# Altium PCB lab_1_zhernakov_usb_rs232.PcbDoc
Units mm, origin at the board's own origin, x right, y up, seen from the top; angles counter-clockwise.
Board outline 60.5 x 36.5 mm, 4 copper layers (Top Layer, Signal Layer 1, Signal Layer 2, Bottom Layer), stack 1.522 mm thick; 33 components, 37 nets, 147 pads, 107 vias.
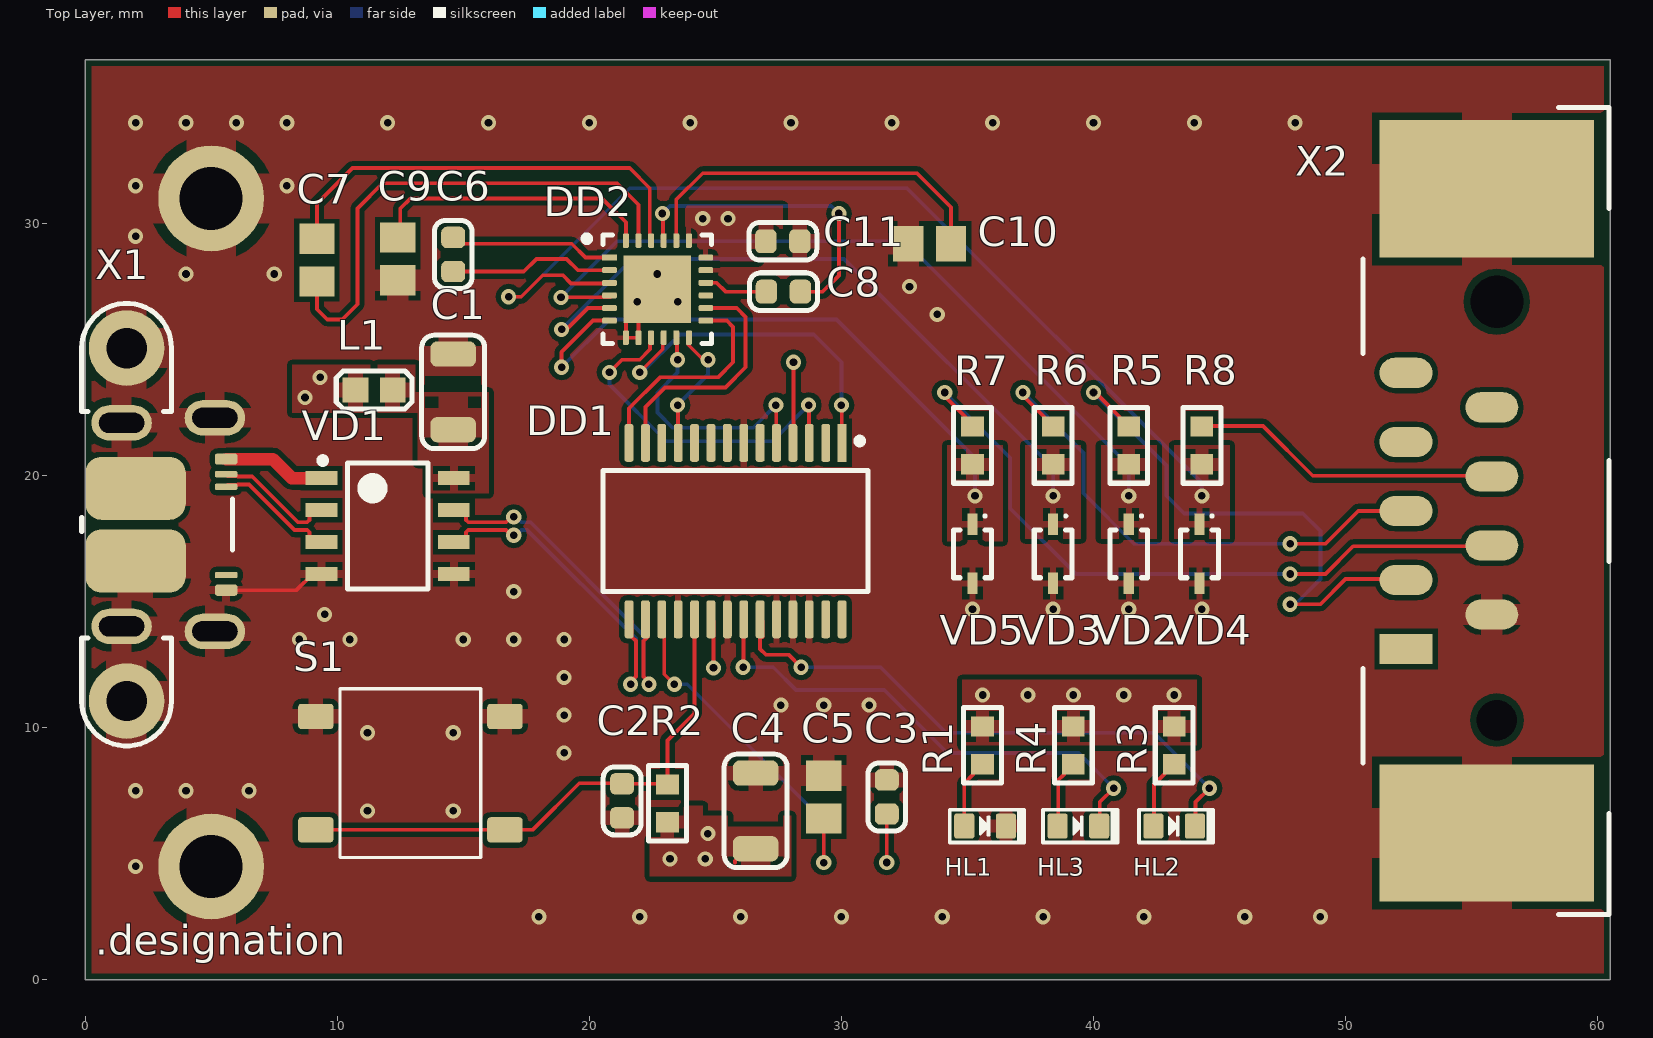
[diagram p0: Top Layer view]
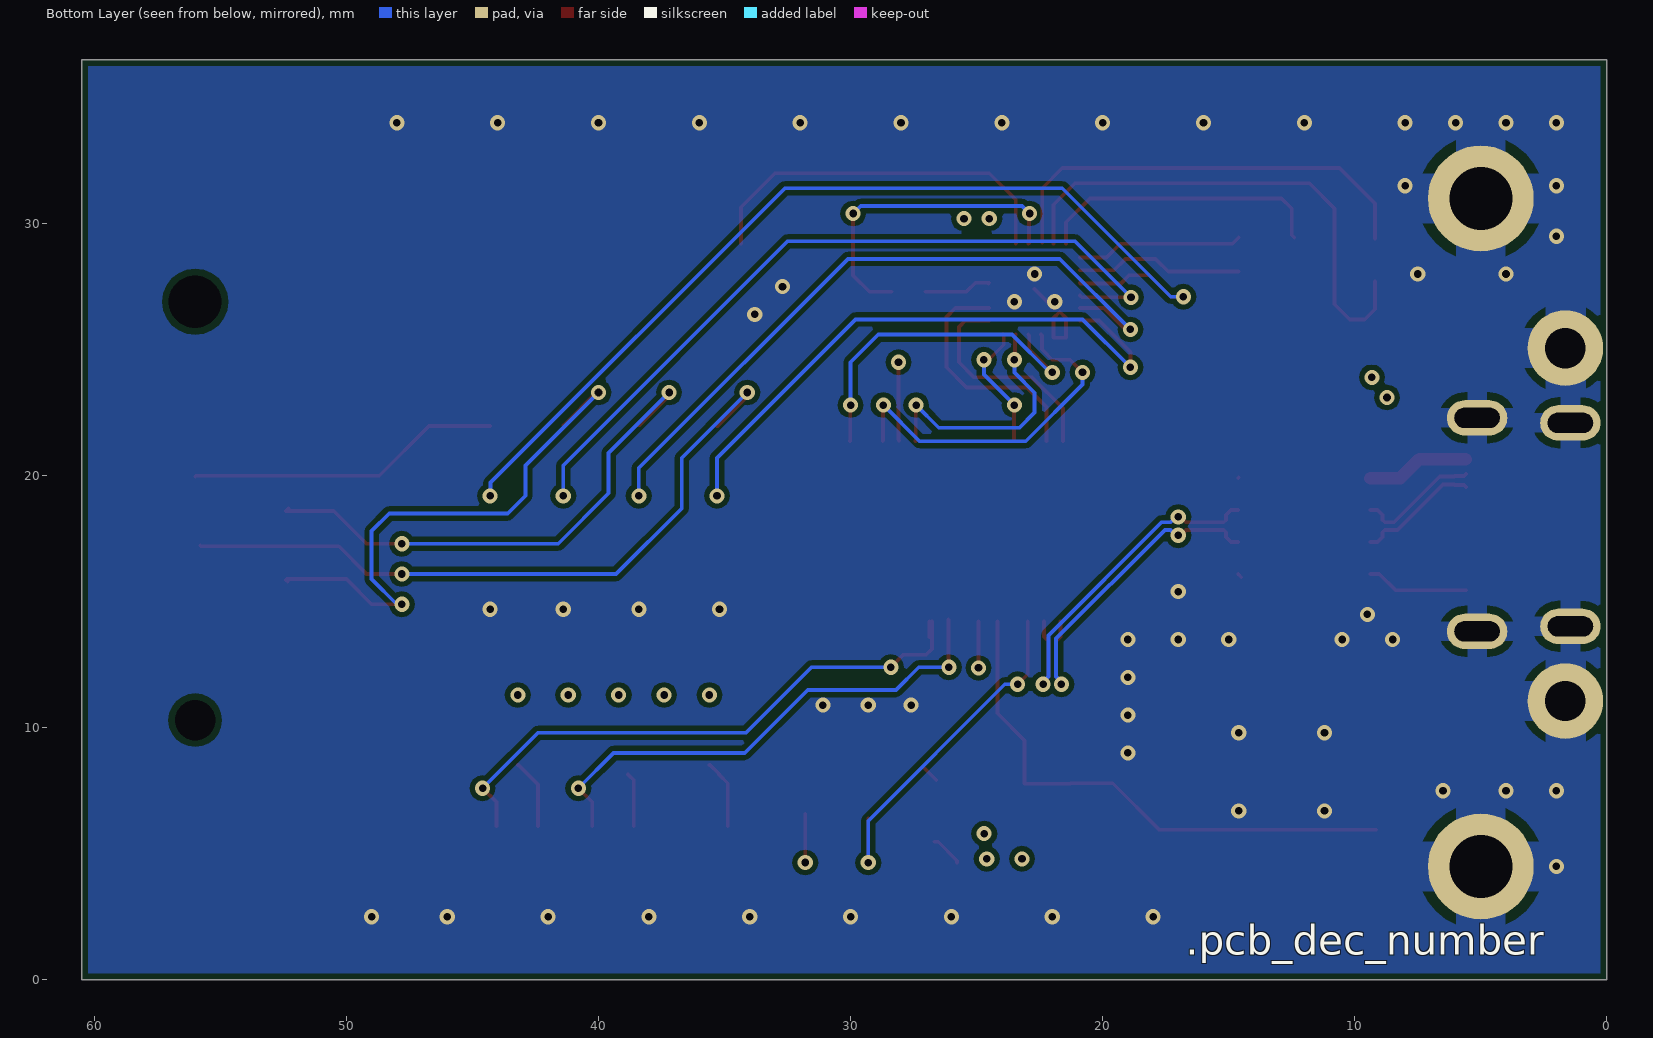
[diagram p1: Bottom Layer view, seen from below]
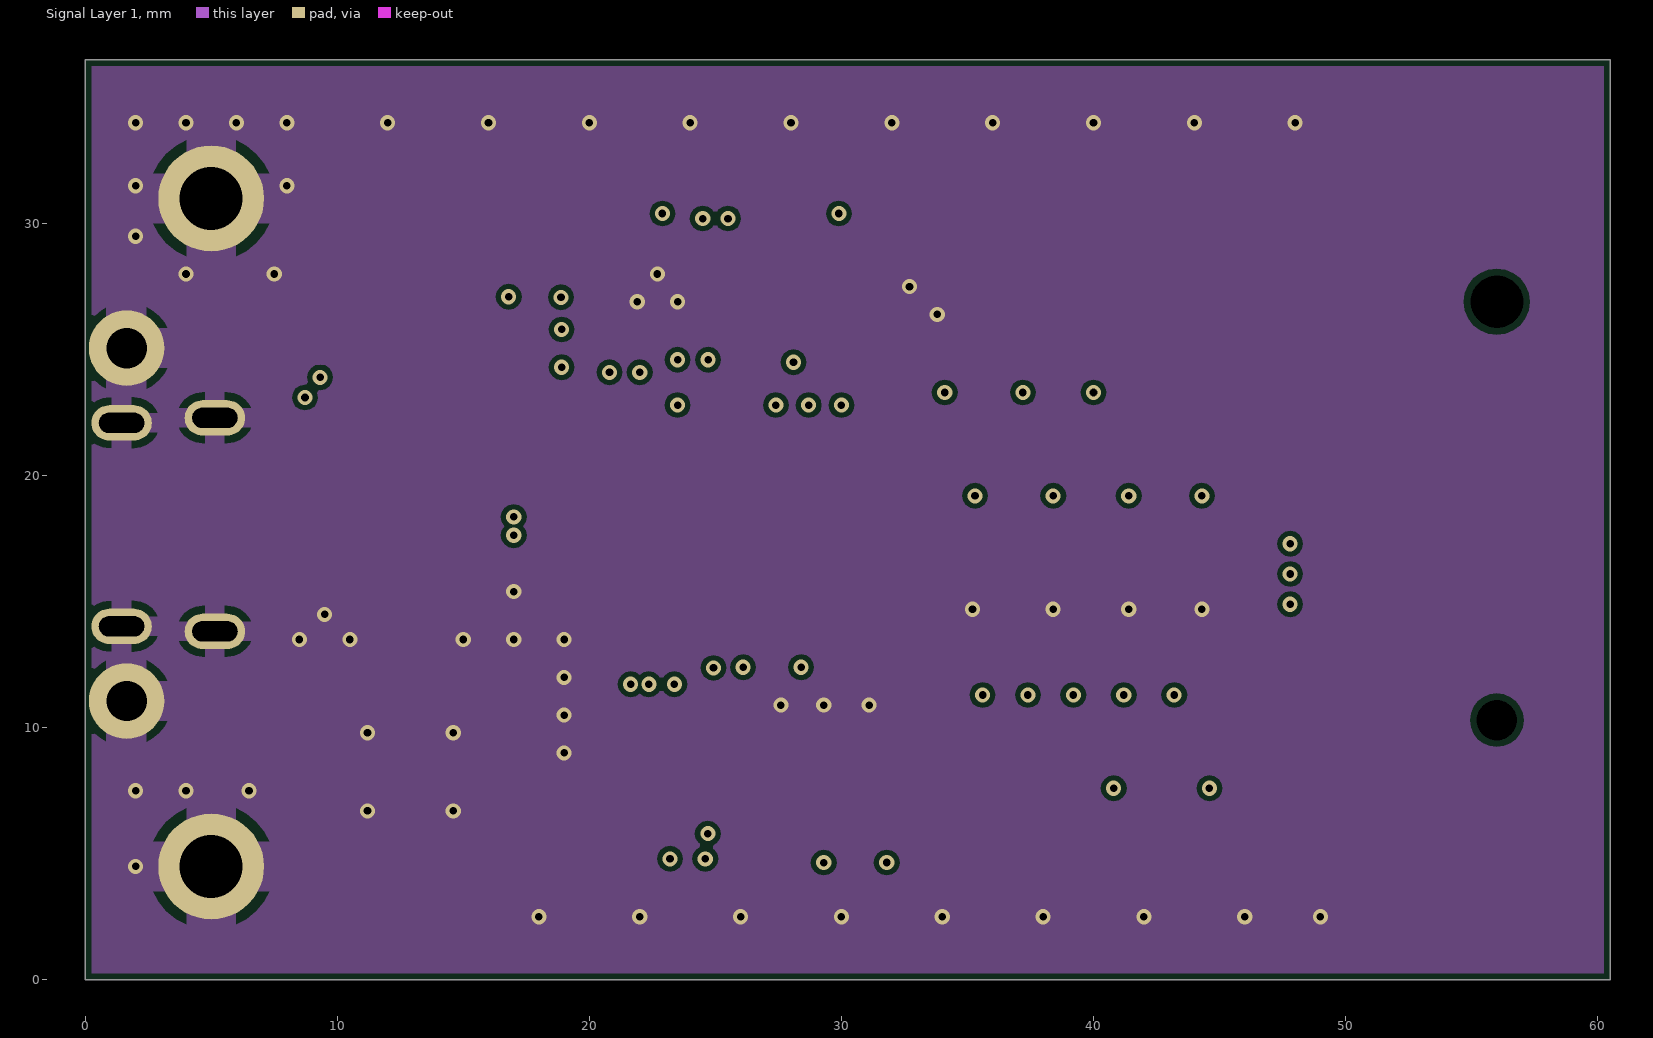
[diagram p2: Signal Layer 1]
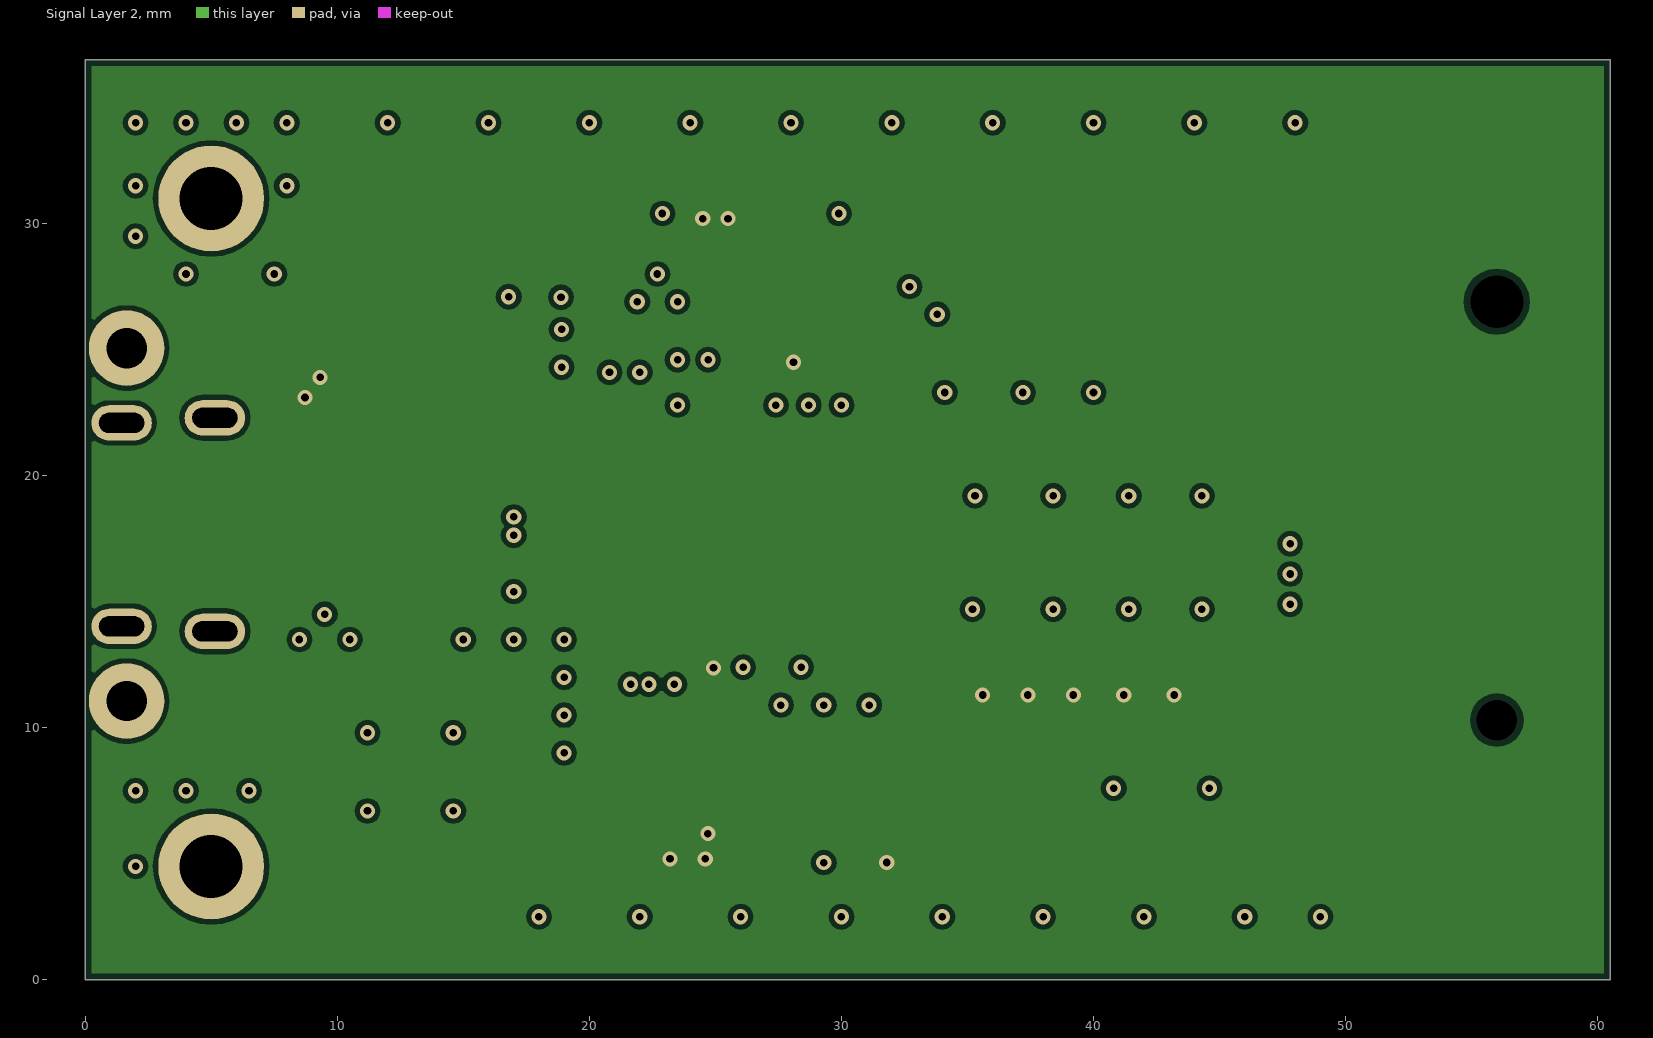
[diagram p3: Signal Layer 2]
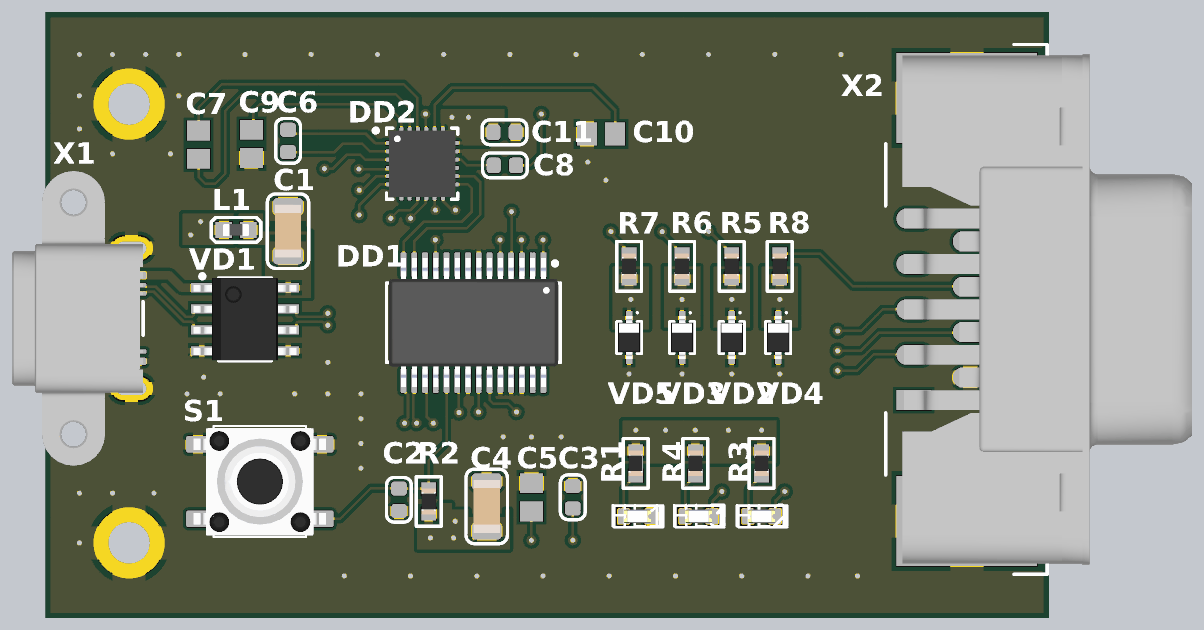
[diagram p4: 3D render of the assembled board from above, using the file's embedded part models]

## Layer stack, top to bottom
Top Solder: solder mask 0.0102, Solder Resist, Dk 3.5
Top Layer: signal copper 0.018
Prepreg 1: prepreg 0.125, FR4 HiTg170, Dk 5.07
Signal Layer 1: signal copper 0.018
Core 1: core 1.2, FR4, Dk 4.6
Signal Layer 2: signal copper 0.018
Prepreg 2: prepreg 0.125, FR4 HiTg170, Dk 5.07
Bottom Layer: signal copper 0.018
Bottom Solder: solder mask 0.0102, Solder Resist, Dk 3.5

## Board outline
0,0 60.5,0 60.5,36.5 0,36.5

## Design rules (kind name [scope] priority, off if disabled: settings)
AcuteAngle min_acute_angle [OnCopper] p1: minimum=3.50000000000000E+0001 checktracksonly=FALSE // Минимальный угол между примитивами топологии
BoardOutlineClearance board_outline_clearance_std [NOT (OnLayer('Bottom Overlay') OR OnLayer('Top Overlay'))] p1: gap=0.25 ignorepadtopadclearanceinfootprint=FALSE except(0: Arc-SplitContinuation Track-SplitContinuation SMDPad-SplitContinuation THPad-SplitContinuation Via-SplitContinuation Fill-SplitContinuation Poly-SplitContinuation Region-SplitContinuation Text-SplitContinuation) // Отступ элементов топологии от края фрезеруемой печатной платы
Clearance clearance_outer_18um_std [OnTopLayer OR OnBottomLayer] p1: gap=0.125 ignorepadtopadclearanceinfootprint=TRUE except(0.2: Arc-Fill Arc-Poly Track-Fill Track-Poly SMDPad-SMDPad SMDPad-Fill SMDPad-Poly THPad-Fill THPad-Poly Via-Fill Via-Poly Fill-Fill Fill-Poly Poly-Poly Poly-Region Poly-Text; 0.25: Arc-Hole Track-Hole SMDPad-Hole THPad-Hole Via-Hole Fill-Hole Poly-Hole Region-Hole Text-Hole) // Зазоры на внешних слоях
Clearance clearance_inner_18um_std [NOT (OnTopLayer Or OnBottomLayer)] p2: gap=0.125 ignorepadtopadclearanceinfootprint=FALSE except(0.2: Arc-Fill Arc-Poly Track-Fill Track-Poly SMDPad-SMDPad SMDPad-Fill SMDPad-Poly THPad-Fill THPad-Poly Via-Fill Via-Poly Fill-Fill Fill-Poly Poly-Poly Poly-Region Poly-Text; 0.25: Arc-Hole Track-Hole SMDPad-Hole THPad-Hole Via-Hole Fill-Hole Poly-Hole Region-Hole Text-Hole) // Зазоры на внутренних слоях
ComponentClearance [All] p1: gap=0 collisioncheckmode=3 verticalgap=0 showdistances=FALSE
DiffPairsRouting "Schematic Differential Pairs Routing_3" [InNet('USB_D_P')] p1: maxlimit=0.254 minlimit=0.15 mostfreqgap=0.254 toplayer_maxgap=0.15 toplayer_prefgap=0.15 toplayer_minwidth=0.155 toplayer_maxwidth=0.155 toplayer_prefwidth=0.155 bottomlayer_maxgap=0.15 bottomlayer_prefgap=0.15 bottomlayer_minwidth=0.155 bottomlayer_maxwidth=0.155 bottomlayer_prefwidth=0.155 impedanceprofiledriven=TRUE impedanceprofileid={1B1F1868-2FFB-4D51-908A-913D90CA9AFC} impedanceprofilevalue=95.000000 maxuncoupledlength=12.7
DiffPairsRouting "Schematic Differential Pairs Routing_2" [InNet('CN_D_P')] p2: maxlimit=0.254 minlimit=0.15 mostfreqgap=0.254 toplayer_maxgap=0.15 toplayer_prefgap=0.15 toplayer_minwidth=0.155 toplayer_maxwidth=0.155 toplayer_prefwidth=0.155 bottomlayer_maxgap=0.15 bottomlayer_prefgap=0.15 bottomlayer_minwidth=0.155 bottomlayer_maxwidth=0.155 bottomlayer_prefwidth=0.155 impedanceprofiledriven=TRUE impedanceprofileid={1B1F1868-2FFB-4D51-908A-913D90CA9AFC} impedanceprofilevalue=95.000000 maxuncoupledlength=12.7
DiffPairsRouting "Schematic Differential Pairs Routing_1" [InNet('CN_D_N')] p3: maxlimit=0.254 minlimit=0.15 mostfreqgap=0.254 toplayer_maxgap=0.15 toplayer_prefgap=0.15 toplayer_minwidth=0.155 toplayer_maxwidth=0.155 toplayer_prefwidth=0.155 bottomlayer_maxgap=0.15 bottomlayer_prefgap=0.15 bottomlayer_minwidth=0.155 bottomlayer_maxwidth=0.155 bottomlayer_prefwidth=0.155 impedanceprofiledriven=TRUE impedanceprofileid={1B1F1868-2FFB-4D51-908A-913D90CA9AFC} impedanceprofilevalue=95.000000 maxuncoupledlength=12.7
DiffPairsRouting "Schematic Differential Pairs Routing" [InNet('USB_D_N')] p4: maxlimit=0.254 minlimit=0.15 mostfreqgap=0.254 toplayer_maxgap=0.15 toplayer_prefgap=0.15 toplayer_minwidth=0.155 toplayer_maxwidth=0.155 toplayer_prefwidth=0.155 bottomlayer_maxgap=0.15 bottomlayer_prefgap=0.15 bottomlayer_minwidth=0.155 bottomlayer_maxwidth=0.155 bottomlayer_prefwidth=0.155 impedanceprofiledriven=TRUE impedanceprofileid={1B1F1868-2FFB-4D51-908A-913D90CA9AFC} impedanceprofilevalue=95.000000 maxuncoupledlength=12.7
DiffPairsRouting diff_pairs_routing [All] p5: maxlimit=0.254 minlimit=0.127 mostfreqgap=0.254 toplayer_maxgap=0.127 toplayer_prefgap=0.127 toplayer_minwidth=0.143 toplayer_maxwidth=0.143 toplayer_prefwidth=0.143 midlayer1_minwidth=0.381 midlayer1_maxwidth=0.381 midlayer1_prefwidth=0.381 midlayer2_minwidth=0.381 midlayer2_maxwidth=0.381 midlayer2_prefwidth=0.381 bottomlayer_maxgap=0.127 bottomlayer_prefgap=0.127 bottomlayer_minwidth=0.143 bottomlayer_maxwidth=0.143 bottomlayer_prefwidth=0.143 impedanceprofiledriven=TRUE impedanceprofileid={FD46899E-B5A2-4EF5-A302-5D2DB6A51F35} maxuncoupledlength=12.7 // Правила трассировки дифференциальных пар
HoleSize min_hole_size_std [IsPad] p1: absolutevalues=TRUE maxlimit=5.9 minlimit=0.6 maxpercent=80.000 minpercent=20.000 // Диаметр межслойного переходного отверстия
HoleSize min_hole_size_via_std [IsVia] p2: absolutevalues=TRUE maxlimit=5.9 minlimit=0.3 maxpercent=80.000 minpercent=20.000 // Минимальный диаметр монтажного отверстия
HoleToHoleClearance hole_to_hole_clearance_std [All] p1: gap=0.2 allowstackedmicrovias=FALSE // Минимальное расстояние между краями двух отверстий
MinimumAnnularRing min_via_ar_std [All] p1: minimumring=0.15 // Поясок площадки переходного отверстия (Annular ring VIA)
MinimumAnnularRing min_pad_ar_std [All] p2: minimumring=0.2 // Поясок монтажной контактной площадки (Annular ring PAD)
MinimumSolderMaskSliver min_solder_mask_bridge_std [All] p1: minsoldermaskwidth=0.15 // Мнимальная ширина масочного мостика
PlaneClearance plane_clearance_18um_std [All] p1: clearance=0.2 // Отступ полигона (для слоя plane) от элементов топологии
PlaneConnect [All] p1: planeconnectstyle=Relief reliefexpansion=0.5 reliefentries=4 reliefconductorwidth=0.2 reliefairgap=0.2
PolygonConnect poly_connect_to_pad<=0.3 [(AsMM(PadXSize_AllLayers)<=0.301) or (AsMM(PadYSize_AllLayers)<=0.301)] p1: thpad.connectstyle=Relief thpad.reliefconductorwidth=0.2 thpad.reliefentries=4 thpad.polygonreliefangle="90 Angle" thpad.airgapwidth=0.2 smdpad.connectstyle=Relief smdpad.reliefconductorwidth=0.2 smdpad.reliefentries=4 smdpad.polygonreliefangle="90 Angle" smdpad.airgapwidth=0.2 via.connectstyle=Direct via.reliefconductorwidth=0.254 via.reliefentries=4 via.polygonreliefangle="90 Angle" via.airgapwidth=0.254 // Правила подключения полигонов для падов от 0,3мм и меньше
PolygonConnect poly_connect_to_pad<=0.4 [(AsMM(PadXSize_AllLayers)<=0.401) or (AsMM(PadYSize_AllLayers)<=0.401)] p2: thpad.connectstyle=Relief thpad.reliefconductorwidth=0.26 thpad.reliefentries=4 thpad.polygonreliefangle="90 Angle" thpad.airgapwidth=0.2 smdpad.connectstyle=Relief smdpad.reliefconductorwidth=0.26 smdpad.reliefentries=4 smdpad.polygonreliefangle="90 Angle" smdpad.airgapwidth=0.2 via.connectstyle=Direct via.reliefconductorwidth=0.254 via.reliefentries=4 via.polygonreliefangle="90 Angle" via.airgapwidth=0.254 // Правила подключения полигонов для падов от 0,4 и меньше
PolygonConnect poly_connect_to_pad<=0.6 [(AsMM(PadXSize_AllLayers)<=0.601) or (AsMM(PadYSize_AllLayers)<=0.601)] p3: thpad.connectstyle=Relief thpad.reliefconductorwidth=0.33 thpad.reliefentries=4 thpad.polygonreliefangle="90 Angle" thpad.airgapwidth=0.2 smdpad.connectstyle=Relief smdpad.reliefconductorwidth=0.33 smdpad.reliefentries=4 smdpad.polygonreliefangle="90 Angle" smdpad.airgapwidth=0.2 via.connectstyle=Direct via.reliefconductorwidth=0.254 via.reliefentries=4 via.polygonreliefangle="90 Angle" via.airgapwidth=0.254 // Правила подключения полигонов для падов от 0,6мм и меньше
PolygonConnect poly_connect_to_pad<=0.7 [(AsMM(PadXSize_AllLayers)<=0.701) or (AsMM(PadYSize_AllLayers)<=0.701)] p4: thpad.connectstyle=Relief thpad.reliefconductorwidth=0.46 thpad.reliefentries=4 thpad.polygonreliefangle="90 Angle" thpad.airgapwidth=0.2 smdpad.connectstyle=Relief smdpad.reliefconductorwidth=0.46 smdpad.reliefentries=4 smdpad.polygonreliefangle="90 Angle" smdpad.airgapwidth=0.2 via.connectstyle=Direct via.reliefconductorwidth=0.254 via.reliefentries=4 via.polygonreliefangle="90 Angle" via.airgapwidth=0.254 // Правила подключения полигонов для падов от 0,7мм и меньше
PolygonConnect poly_connect_to_pad<=0.8 [(AsMM(PadXSize_AllLayers)<=0.8)or(AsMM(PadYSize_AllLayers)<=0.8)] p5: thpad.connectstyle=Relief thpad.reliefconductorwidth=0.53 thpad.reliefentries=4 thpad.polygonreliefangle="90 Angle" thpad.airgapwidth=0.3 smdpad.connectstyle=Relief smdpad.reliefconductorwidth=0.53 smdpad.reliefentries=4 smdpad.polygonreliefangle="90 Angle" smdpad.airgapwidth=0.2 via.connectstyle=Direct via.reliefconductorwidth=0.254 via.reliefentries=4 via.polygonreliefangle="90 Angle" via.airgapwidth=0.254 // Правила подключения полигонов для падов от 0,8мм и меньше
PolygonConnect poly_connect_to_pad<=1 [(AsMM(PadXSize_AllLayers)<=1.01)or(AsMM(PadYSize_AllLayers)<=1.01)] p6: thpad.connectstyle=Relief thpad.reliefconductorwidth=0.6 thpad.reliefentries=4 thpad.polygonreliefangle="90 Angle" thpad.airgapwidth=0.3 smdpad.connectstyle=Relief smdpad.reliefconductorwidth=0.6 smdpad.reliefentries=4 smdpad.polygonreliefangle="90 Angle" smdpad.airgapwidth=0.2 via.connectstyle=Direct via.reliefconductorwidth=0.254 via.reliefentries=4 via.polygonreliefangle="90 Angle" via.airgapwidth=0.254 // Правила подключения полигонов для падов от 1мм и меньше
PolygonConnect poly_connect_to_pad<=1.3 [(AsMM(PadXSize_AllLayers)<=1.31)or(AsMM(PadYSize_AllLayers)<=1.31)] p7: thpad.connectstyle=Relief thpad.reliefconductorwidth=0.66 thpad.reliefentries=4 thpad.polygonreliefangle="90 Angle" thpad.airgapwidth=0.3 smdpad.connectstyle=Relief smdpad.reliefconductorwidth=0.86 smdpad.reliefentries=4 smdpad.polygonreliefangle="90 Angle" smdpad.airgapwidth=0.2 via.connectstyle=Direct via.reliefconductorwidth=0.254 via.reliefentries=4 via.polygonreliefangle="90 Angle" via.airgapwidth=0.254 // Правила подключения полигонов для падов от 1,3мм и меньше
PolygonConnect poly_connect_to_pad<=1.6 [(AsMM(PadXSize_AllLayers)<=1.61)or(AsMM(PadYSize_AllLayers)<=1.61)] p8: thpad.connectstyle=Relief thpad.reliefconductorwidth=0.8 thpad.reliefentries=4 thpad.polygonreliefangle="90 Angle" thpad.airgapwidth=0.3 smdpad.connectstyle=Relief smdpad.reliefconductorwidth=1 smdpad.reliefentries=4 smdpad.polygonreliefangle="90 Angle" smdpad.airgapwidth=0.2 via.connectstyle=Direct via.reliefconductorwidth=0.254 via.reliefentries=4 via.polygonreliefangle="90 Angle" via.airgapwidth=0.254 // Правила подключения полигонов для падов от 1,6мм и меньше
PolygonConnect poly_connect_to_pad<=1.8 [(AsMM(PadXSize_AllLayers)<=1.8)or(AsMM(PadYSize_AllLayers)<=1.8)] p9: thpad.connectstyle=Relief thpad.reliefconductorwidth=1 thpad.reliefentries=4 thpad.polygonreliefangle="90 Angle" thpad.airgapwidth=0.3 smdpad.connectstyle=Relief smdpad.reliefconductorwidth=1.2 smdpad.reliefentries=4 smdpad.polygonreliefangle="90 Angle" smdpad.airgapwidth=0.2 via.connectstyle=Direct via.reliefconductorwidth=0.254 via.reliefentries=4 via.polygonreliefangle="90 Angle" via.airgapwidth=0.254 // Правила подключения полигонов для падов от 1,8мм и меньше
PolygonConnect poly_connect_to_pad<=2 [(AsMM(PadXSize_AllLayers)<=2.01)or(AsMM(PadYSize_AllLayers)<=2.01)] p10: thpad.connectstyle=Relief thpad.reliefconductorwidth=1.1 thpad.reliefentries=4 thpad.polygonreliefangle="90 Angle" thpad.airgapwidth=0.3 smdpad.connectstyle=Relief smdpad.reliefconductorwidth=1.4 smdpad.reliefentries=4 smdpad.polygonreliefangle="90 Angle" smdpad.airgapwidth=0.2 via.connectstyle=Direct via.reliefconductorwidth=0.254 via.reliefentries=4 via.polygonreliefangle="90 Angle" via.airgapwidth=0.254 // Правила подключения полигонов для падов от 2мм и меньше
PolygonConnect poly_connect_to_pad<=2.3 [(AsMM(PadXSize_AllLayers)<=2.31)or(AsMM(PadYSize_AllLayers)<=2.31)] p11: thpad.connectstyle=Relief thpad.reliefconductorwidth=1.2 thpad.reliefentries=4 thpad.polygonreliefangle="90 Angle" thpad.airgapwidth=0.3 smdpad.connectstyle=Relief smdpad.reliefconductorwidth=1.4 smdpad.reliefentries=4 smdpad.polygonreliefangle="90 Angle" smdpad.airgapwidth=0.2 via.connectstyle=Direct via.reliefconductorwidth=0.254 via.reliefentries=4 via.polygonreliefangle="90 Angle" via.airgapwidth=0.254 // Правила подключения полигонов для падов от 2,3мм и меньше
PolygonConnect poly_connect_to_pad<=2.5 [(AsMM(PadXSize_AllLayers)<=2.51)or(AsMM(PadYSize_AllLayers)<=2.51)] p12: thpad.connectstyle=Relief thpad.reliefconductorwidth=1.2 thpad.reliefentries=4 thpad.polygonreliefangle="90 Angle" thpad.airgapwidth=0.3 smdpad.connectstyle=Relief smdpad.reliefconductorwidth=1.4 smdpad.reliefentries=4 smdpad.polygonreliefangle="90 Angle" smdpad.airgapwidth=0.2 via.connectstyle=Direct via.reliefconductorwidth=0.254 via.reliefentries=4 via.polygonreliefangle="90 Angle" via.airgapwidth=0.254 // Правила подключения полигонов для падов от 2,5мм и меньше
PolygonConnect poly_connect_to_pad<=2.7 [(AsMM(PadXSize_AllLayers)<=2.71)or(AsMM(PadYSize_AllLayers)<=2.71)] p13: thpad.connectstyle=Relief thpad.reliefconductorwidth=1.4 thpad.reliefentries=4 thpad.polygonreliefangle="90 Angle" thpad.airgapwidth=0.3 smdpad.connectstyle=Relief smdpad.reliefconductorwidth=1.6 smdpad.reliefentries=4 smdpad.polygonreliefangle="90 Angle" smdpad.airgapwidth=0.2 via.connectstyle=Direct via.reliefconductorwidth=0.254 via.reliefentries=4 via.polygonreliefangle="90 Angle" via.airgapwidth=0.254 // Правила подключения полигонов для падов от 2,7мм и меньше
PolygonConnect poly_connect_to_pad<=3 [(AsMM(PadXSize_AllLayers)<=3.01)or(AsMM(PadYSize_AllLayers)<=3.01)] p14: thpad.connectstyle=Relief thpad.reliefconductorwidth=1.6 thpad.reliefentries=4 thpad.polygonreliefangle="90 Angle" thpad.airgapwidth=0.3 smdpad.connectstyle=Relief smdpad.reliefconductorwidth=1.8 smdpad.reliefentries=4 smdpad.polygonreliefangle="90 Angle" smdpad.airgapwidth=0.2 via.connectstyle=Direct via.reliefconductorwidth=0.254 via.reliefentries=4 via.polygonreliefangle="90 Angle" via.airgapwidth=0.254 // Правила подключения полигонов для падов от 3мм и меньше
PolygonConnect poly_connect_to_pad<=7 [(AsMM(PadXSize_AllLayers)<7.01)or(AsMM(PadYSize_AllLayers)<=7.01)] p15: thpad.connectstyle=Relief thpad.reliefconductorwidth=2 thpad.reliefentries=4 thpad.polygonreliefangle="90 Angle" thpad.airgapwidth=0.4 smdpad.connectstyle=Relief smdpad.reliefconductorwidth=2 smdpad.reliefentries=4 smdpad.polygonreliefangle="90 Angle" smdpad.airgapwidth=0.3 via.connectstyle=Direct via.reliefconductorwidth=0.254 via.reliefentries=4 via.polygonreliefangle="90 Angle" via.airgapwidth=0.254 // Правила подключения полигонов для падов от 7мм и меньше
PolygonConnect poly_connect_to_pad [All] p16: thpad.connectstyle=Relief thpad.reliefconductorwidth=0.25 thpad.reliefentries=4 thpad.polygonreliefangle="90 Angle" thpad.airgapwidth=0.2 smdpad.connectstyle=Relief smdpad.reliefconductorwidth=0.25 smdpad.reliefentries=4 smdpad.polygonreliefangle="90 Angle" smdpad.airgapwidth=0.2 via.connectstyle=Direct via.reliefconductorwidth=0.25 via.reliefentries=4 via.polygonreliefangle="90 Angle" via.airgapwidth=0.2 // Правила подключения полигонов общие
RoutingCorners [All] p1 off: cornerstyle=45-Degree minsetback=2.5 maxsetback=2.5
RoutingVias [All] p1: holewidth=0.3 width=0.6 viastyle="Through Hole" minholewidth=0.3 minwidth=0.6 maxholewidth=5.9 maxwidth=6.4
SilkToSilkClearance silk_to_silk_clearance_std [All] p1 off: silktosilkclearance=0.15 // Отступ текста шелкографии от других примитивов шелкографии
SilkToSolderMaskClearance silk_to_solder_mask_clearance_std [IsPad] p1 off: minsilkscreentomaskgap=0.15 clearancetoexposedcopper=FALSE // Минимальное расстояние между элементами шелкографии и вскрытой медью
SolderMaskExpansion solder_mask_expansion_std [All] p1: expansion=0.05 // Припуск паяльной масски
UnRoutedNet [All] p1: checkbadconnections=TRUE
Width width_18um_std [All] p1: maxlimit=10 minlimit=0.125 preferedwidth=0.15 checkconnectedcopper=TRUE // Ширина проводников (общая)
19 further rules are at their usual default settings.

## Classes and differential pairs
differential pair class USB_SIGNALS: CN_D USB_D
differential pair USB_D: +USB_D_P -USB_D_N
differential pair CN_D: +CN_D_P -CN_D_N

## Components (designator, comment, footprint, x,y, rotation, side; value= is the part's Value field where it differs from the comment)
C1 "0,1 мк" C1206 14.6,23.325 r90 top
C2 "0,1 мк" C0603 21.3,7.1 r270 top
C3 "0,1 мк" C0603 31.8,7.254 r270 top
C4 "4,7  мк" C1206 26.6,6.7 r90 top
C5 "0,1 мк" C0805 29.3,7.25 r270 top
C6 "0,1 мк" C0603 14.6,28.775 r90 top
C7 "0,33 мк" C0805 9.2,28.55 r90 top
C8 "0,047 мк" C0603 27.7,27.3 r0 top
C9 "0,33 мк" C0805 12.4,28.6 r90 top
C10 "0,33 мк" C0805 33.5,29.2 r0 top
C11 "0,1 мк" C0603 27.675,29.3 r180 top
DD1 "FT232RL" SSOP-28 25.8,17.8 r270 top
DD2 "TRS3122ERGET" QFN-24-400x400x100 22.7,27.4 r0 top
HL1 "#NAME?" D0603 35.7,6.1 r0 top
HL2 "#NAME?" D0603 43.2,6.1 r0 top
HL3 "#NAME?" D0603 39.4,6.1 r0 top
L1 "BLM18KG221SH1D" BLM-2-0603 11.46,23.4 r180 top
R1 "220" R0603 35.6,9.3 r90 top
R2 "10к" R0603 23.1,7 r90 top
R3 "270" R0603 43.2,9.3 r90 top
R4 "270" R0603 39.2,9.3 r90 top
R5 "33" R0603 41.4,21.2 r90 top
R6 "33" R0603 38.4,21.2 r90 top
R7 "33" R0603 35.2,21.2 r90 top
R8 "33" R0603 44.3,21.2 r90 top
S1 "KLS7-TS6604-5.0-180-B" KLS7-TS6604-5.0-180-B 12.9,8.2 r180 top
VD1 "USB6B1" SO-8 12,18 r0 top
VD2 "CDSOD323-T12LC" SOD-323 41.4,16.9 r270 top
VD3 "CDSOD323-T12LC" SOD-323 38.4,16.9 r270 top
VD4 "CDSOD323-T12LC" SOD-323 44.2,16.9 r270 top
VD5 "CDSOD323-T12LC" SOD-323 35.2,16.9 r270 top
X1 "2108877-1" 2108877-1 1.896,18.059 r90 top
X2 "1-1740194-2" 1-1740194-2 60.2,18.6 r270 top

## Footprints (in the part's own frame and the unit in brackets; to place one, negate y for a bottom-side part, rotate by r counter-clockwise, add the part's x,y. Pads: shape width x height; smd on the part's side, far side on the other; paste and mask are expansions set on the pad)
1-1740194-2 [mm]
  rect 1.2x2.1 smd: 1(5.48,-7.8)
  oval 1.2x2.1 smd: 2(2.74,-7.8) 3(0,-7.8) 4(-2.74,-7.8) 5(-5.48,-7.8) 6(4.11,-4.4) 7(1.37,-4.4) 8(-1.37,-4.4) 9(-4.11,-4.4)
  rect 5.45x8.5 smd: TP1(-12.775,-4.6) TP1(12.775,-4.6)
  round 0 hole 2.1: ""(-8.3,-4.2)
  round 0 hole 1.6: ""(8.3,-4.2)
  silkscreen extent -16,-9.5 16,0.25, body extent -15.4,-8.5 15.4,9, height 9.87
2108877-1 [mm]
  rrect50% 0.45x0.9 smd: 1(2.6,-3.696) 5(-2.6,-3.696)
  rrect50% 0.25x0.9 smd: 2(2,-3.696) 3(1.5,-3.696) 4(-2,-3.696)
  round 3 hole 1.6: TP1(-7,0.25) TP1(7,0.25)
  oval 1.4x2.4 hole 0.8 slot 1.8 at 90 deg mask+0.102: TP1(-4.235,-3.25) TP1(-4.035,0.45) TP1(4.035,0.45) TP1(4.235,-3.25)
  rrect50% 2.5x3.98 smd: TP1(-1.441,-0.104) TP1(1.441,-0.104)
  silkscreen extent -8.78,-3.95 8.78,2.03, body extent -8.9,-3.95 8.9,3.95, height 3.39
BLM-2-0603 [mm] "Chip Inductor, 2-Leads, Body 1,60x0,80mm, IPC Medium Density"
  rect 1.02x0.98 smd: 1(-0.74,0) 2(0.74,0)
  silkscreen extent -1.5,-0.75 1.5,0.75, body extent -0.8,-0.37 0.8,0.38, height 0.8
C0603 [mm] "Chip Capacitor, 2-Leads, Body 1,60x0,80mm, IPC Medium Density"
  rrect50% 0.85x0.95 smd: 1(-0.675,0) 2(0.675,0)
  Top Layer pour cut-out: -0.254,0.5 -0.254,-0.5 0.254,-0.5 0.254,0.5
  silkscreen extent -1.35,-0.75 1.35,0.75, body extent -0.85,-0.45 0.85,0.45, height 0.9
C0805 [mm] "Chip Capacitor, 2-Leads, Body 2,00x1,25mm, IPC Medium Density"
  rect 1.2x1.4 smd: 1(-0.85,0) 2(0.85,0)
  body extent -1.05,-0.67 1.05,0.67, height 1.35
C1206 [mm] "Chip Capacitor, 2-Leads, Body 3,20x1,60mm, IPC Medium Density"
  rrect50% 1x1.8 smd: 1(-1.5,0) 2(1.5,0)
  silkscreen extent -2.25,-1.25 2.25,1.25, body extent -1.6,-0.8 1.6,0.8, height 0.78
D0603 [mm]
  rrect25% 0.8x1 smd paste-10 mask+0.1: 1(-0.825,0) 2(0.825,0)
  silkscreen extent -1.4,-0.65 1.55,0.65, body extent -0.81,-0.4 0.81,0.4, height 0.6
KLS7-TS6604-5.0-180-B [mm] "6.5x6.5mm SMD tact switch 5mm stem"
  rrect25% 1.4x1 smd: 1(-3.75,2.25) 1(3.75,2.25) 2(-3.75,-2.25) 2(3.75,-2.25)
  silkscreen extent -2.79,-3.35 2.79,3.35, body extent -4,-3.25 4,3.25, height 4.3
QFN-24-400x400x100 [mm] "QFN, 24-Leads, Body 4,00x4,00mm, Pitch 0,50mm, Thermal Pad 2,68x2,68mm, IPC Medium Density"
  rect 2.68x2.68 smd: 0(0,0)
  rect 0.58x0.24 smd: 1(-1.9,1.25)
  rrect50% 0.58x0.24 smd: 2(-1.9,0.75) 3(-1.9,0.25) 4(-1.9,-0.25) 5(-1.9,-0.75) 6(-1.9,-1.25) 13(1.925,-1.25) 14(1.925,-0.75) 15(1.925,-0.25) 16(1.925,0.25) 17(1.925,0.75) 18(1.925,1.25)
  rrect50% 0.24x0.58 smd: 7(-1.25,-1.925) 8(-0.75,-1.925) 9(-0.25,-1.925) 10(0.25,-1.925) 11(0.75,-1.925) 12(1.25,-1.925) 19(1.25,1.925) 20(0.75,1.925) 21(0.25,1.925) 22(-0.25,1.925) 23(-0.75,1.925) 24(-1.25,1.925)
  silkscreen extent -2.92,-2.15 2.15,2.15, body extent -2,-2 2.01,2.01, height 0.9
R0603 [mm] "Chip Resistor, 2-Leads, Body 1,60x0,80mm, IPC Medium Density"
  rect 0.8x0.9 smd: 1(-0.75,0) 2(0.75,0)
  silkscreen extent -1.5,-0.75 1.5,0.75, body extent -0.77,-0.43 0.78,0.43, height 0.43
SO-8 [mm]
  rect 1.25x0.55 smd: 1(-2.625,1.905) 2(-2.625,0.635) 3(-2.625,-0.635) 4(-2.625,-1.905) 5(2.625,-1.905) 6(2.625,-0.635) 7(2.625,0.635) 8(2.625,1.905)
  silkscreen extent -2.7,-2.5 1.6,2.72, body extent -3.1,-2.5 3.1,2.5, height 1.75
SOD-323 [mm] "SODFL, 2-Leads, Body 1,30x2,57mm, IPC Medium Density"
  rect 0.85x0.4 smd: 1(-1.175,0) 2(1.175,0)
  silkscreen extent -1.55,-0.75 0.95,0.75, body extent -1.3,-0.67 1.3,0.68, height 1.1
SSOP-28 [mm] "SSOP, 28-Leads, Body 10,28x5,30mm, Pitch 0,65mm, IPC Medium Density"
  rect 1.5x0.35 smd: 1(-3.5,4.225)
  rrect50% 1.5x0.35 smd: 2(-3.5,3.575) 3(-3.5,2.925) 4(-3.5,2.275) 5(-3.5,1.625) 6(-3.5,0.975) 7(-3.5,0.325) 8(-3.5,-0.325) 9(-3.5,-0.975) 10(-3.5,-1.625) 11(-3.5,-2.275) 12(-3.5,-2.925) 13(-3.5,-3.575) 14(-3.5,-4.225) 15(3.5,-4.225) 16(3.5,-3.575) 17(3.5,-2.925) 18(3.5,-2.275) 19(3.5,-1.625) 20(3.5,-0.975) 21(3.5,-0.325) 22(3.5,0.325) 23(3.5,0.975) 24(3.5,1.625) 25(3.5,2.275) 26(3.5,2.925) 27(3.5,3.575) 28(3.5,4.225)
  silkscreen extent -3.7,-5.25 2.4,5.25, body extent -3.9,-5.1 3.9,5.1, height 2

## Part data
C1: library part c0006, "=Описание", HelpURL=https://www.vishay.com/docs/40002/293d.pdf, ID=c0006, Корпус=3216-18, Наименование="293D 104 X5 025 A 2WE3", Номинал="0,1 мк", Номинальное напряжение="25 В", Описание="Конденсатор полярный", Отклонение="±10 %", Производитель=Vishay, Рабочие температуры="от -55 °С до +125 °С", Фамилия=Жернаков
C2 C3 C5 C6 C11: library part c0002, "=Описание", HelpURL=http://product.samsungsem.com/mlcc/CL10B104JB8NNN.do, ID=c0002, Корпус=0603, Наименование=CL10B104JB8NNNC, Номинал="0,1 мк", Номинальное напряжение="50 В", Описание=Конденсатор, Отклонение="±5 %", Производитель="Samsung electro-mechanics", Рабочие температуры="от -55 °С до +125 °С", Фамилия=Жернаков
C4: library part c0005, "=Описание", ID=c0005, Корпус=3216-18, Номинал="4,7  мк", Номинальное напряжение="25 В", Описание="Конденсатор полярный", Отклонение="±5 %", Производитель=Vishay, Рабочие температуры="от -55 °С до +125 °С", Фамилия=Жернаков
C7 C9 C10: library part c0003, "=Описание", HelpURL=http://product.samsungsem.com/mlcc/CL21B334KBFNFN.do, ID=c0003, Корпус=0805, Наименование=CL21B334KBFNFNE, Номинал="0,33 мк", Номинальное напряжение="50 В", Описание=Конденсатор, Отклонение="±10 %", Производитель="Samsung electro-mechanics", Рабочие температуры="от -55 °С до +125 °С", Фамилия=Жернаков
C8: library part с0004, "=Описание", HelpURL=http://product.samsungsem.com/mlcc/CL10B473JB8NNN.do, ID=с0004, Корпус=0603, Наименование=CL10B473JB8NNNC, Номинал="0,047 мк", Номинальное напряжение="50 В", Описание=Конденсатор, Отклонение="±5 %", Производитель="Samsung electro-mechanics", Рабочие температуры="от -55 °С до +125 °С", Фамилия=Жернаков
DD1: library part dd0015, "=Описание", HelpURL=https://ftdichip.com/products/ft232rl/, ID=dd0015, Корпус=SSOP-28, Наименование=FT232RL, Описание="Преобразователь USB-UART", Производитель="FTDI Limited", Фамилия=Жернаков
DD2: library part dd0012, "=Описание", HelpURL=https://www.ti.com/product/TRS3122E, ID=dd0012, Корпус=QFN-24, Наименование=TRS3122ERGET, Описание="Приемопередатчик RS-232", Производитель="Texas Instruments", Фамилия=Жернаков
HL1 HL2 HL3: library part vd0001, "=Описание", ID=vd0001, Описание=Светодиод, Фамилия=Жернаков
L1: library part l0001, "=Описание", HelpURL=https://www.murata.com/en-global/products/productdetail.aspx?partno=BLM18KG221SH1%23, ID=l0001, Корпус=0603, Наименование=BLM18KG221SH1D, Номинал="220 Ом", Описание="Ферритовая бусина 220 Ом ±25 %", Отклонение="±25 %", Производитель="Murata Manufacturing Co., Ltd.", Рабочие температуры="от -55 °С до +125 °С", Фамилия=Жернаков
R1: library part r0004, "=Описание", ID=r0004, Корпус='0603, Наименование=RC0603F221CS, Номинал=220, Номинальное напряжение="25 В", Номинальный ток="0,5 А", Описание=Резистор, Отклонение="±1 %", Производитель=Samsung, Рабочие температуры="от -55 °С до +150 °С", Фамилия=Жернаков
R2: library part r0003, "=Описание", ID=r0003, Корпус=0603, Наименование=RC0603F103CS, Номинал=10к, Номинальное напряжение="25 В", Номинальный ток="0,5 А", Описание=Резистор, Отклонение="±1 %", Производитель=Samsung, Рабочие температуры="от -55 °С до +150 °С", Фамилия=Жернаков
R3 R4: library part r0005, "=Описание", HelpURL=http://product.samsungsem.com/cr/RC0603F271CS.do, ID=r0005, Корпус=0603, Наименование=RC0603F271CS, Номинал=270, Номинальное напряжение="25 В", Номинальный ток="0,5 А", Описание=Резистор, Отклонение="±1 %", Производитель=Samsung, Рабочие температуры="от -55 °С до +150 °С", Фамилия=Жернаков
R5 R6 R7 R8: library part r0006, "=Описание", HelpURL=http://product.samsungsem.com/cr/RC0603F330CS.do, ID=r0006, Корпус=0603, Наименование=RC0603F330CS, Номинал=33, Номинальное напряжение="25 В", Номинальный ток="0,5 А", Описание="Резистор 33 Ом", Отклонение="±1 %", Производитель=Samsung, Рабочие температуры="от -55 °С до +150 °С", Фамилия=Жернаков
S1: library part s0006, "=Описание", HelpURL=http://www.klsele.com/products/Switches/Tact-Switches-Series/939.html, ID=s0006, Количество контактов=4, Корпус="6,00 x 6,00 x 3,50", Наименование=KLS7-TS6604-5.0-180-B, Описание="Тактовая кнопка поверхностного монтажа", Производитель=KLS, Промывка=Запрещена, Рабочие температуры="от –20 °С до +70 °С", Сопротивление контакта="50 мОм", Ток нагрузки="50 мА @ 12 В", Фамилия=Паньков
VD1: library part asmvd0007, ID=asmvd0007, Корпус=SO-8, Наименование=USB6B1, Описание="Защита от перенапряжений", Фамилия=Жернаков
VD2 VD3 VD4 VD5: library part vd0014, "=Описание", HelpURL=https://www.bourns.com/products/diodes/tvs-diodes/product/CDSOD323-TxxLC%20Series, ID=vd0014, Корпус=SOD-323, Наименование=CDSOD323-T12LC, Описание="Двунаправленная диодная сборка для подавления помех, 12 В", Производитель=Bourns, Фамилия=Жернаков
X1: library part 2108877-1_micro_usb-b, Contact_1=VBUS, Contact_2=D-, Contact_3=D+, Contact_4=ID, Contact_5=GND, Наименование=2108877-1
X2: library part x0002, Contact_1=CD, Contact_2=RD, Contact_3=TD, Contact_4=DTR, Contact_5=GND, Contact_6=DSR, Contact_7=RTS, Contact_8=CTS, Contact_9=RI, HelpURL=https://www.te.com/global-en/product-1-1740194-2.html, ID=x0002, Наименование=1-1740194-2, Описание="D-Sub 9 pin Board-to-Board", Производитель="TE Connectivity", Фамилия=Ларионов

## Free pads (board coordinates)
  round 4.2 hole 2.5: 2(5,4.5) 2(5,31)

## Via types
v1: diameter 0.6, hole 0.3, Top Layer to Bottom Layer, tented both sides, 107 vias

## Nets (pads, with @x,y where several pads share a name; then routed paths per layer and width w, separated by ;. In a path a pad name is that pad's centre, name@x,y a point inside that pad or via, vN(x,y) a via of type N, cw(c..) or ccw(c..) an arc to the next point about the centre after c; other vN are vias at no path point)
+5V: C3.2 C4.1 C11.2 DD1.4 DD1.20 DD2.18 DD2.19 L1.2 R1.2 R2.1 R3.2 R4.2 | length 8.2
  Top Layer w0.15: v1(24.925,12.375) DD1.20@24.925,14.225 ; 25.775,4.65 25.775,4.725 26.525,5.475 C4.1@26.675,5.475 ; DD1.4@28.088,21.388 28.075,21.4 28.1,21.425 v1(28.1,24.5) ; v1(31.8,4.654) C3.2
  other v1: 23.2,4.8 24.6,4.8 24.7,5.8 35.6,11.3 37.4,11.3 39.2,11.3 41.2,11.3 43.2,11.3 8.72,23.1 9.32,23.9 24.5,30.2 25.5,30.2
CN_5V_IN: VD1.1 X1.1 | length 4.1
  Top Layer w0.5: X1.1 7.441,20.659 8.195,19.905 VD1.1
CN_D_N: VD1.2 X1.2 | length 4.9
  Top Layer w0.155: X1.2 5.664,19.986 6.03,19.986 6.055,19.961 6.627,19.961 8.435,18.153 8.802,18.153 8.893,18.243 8.893,18.438 9.091,18.635 VD1.2
CN_D_P: VD1.3 X1.3 | length 4.9
  Top Layer w0.155: X1.3 5.664,19.631 6.03,19.631 6.055,19.656 6.5,19.656 8.309,17.847 8.802,17.847 8.893,17.757 8.893,17.562 9.091,17.365 VD1.3
CTS: DD1.11 DD2.12 | length 5.2
  Top Layer w0.15: v1(23.5,22.8) 23.513,22.788 23.513,21.387 DD1.11@23.525,21.375 ; DD2.12@23.95,25.6 23.925,25.575 23.925,25.196 24.521,24.6 v1(24.711,24.6)
  Bottom Layer w0.15: v1(23.5,22.8) 24.711,24.011 v1(24.711,24.6)
CTS_IN: DD2.3 R8.1 VD4.1 | length 39.2
  Top Layer w0.15: v1(16.8,27.1) 17.3,27.1 18.15,27.95 18.95,27.95 19.275,27.625 20.875,27.625 DD2.3@20.9,27.65
  Bottom Layer w0.15: v1(16.8,27.1) 17.3,27.1 21.6,31.4 32.607,31.4 44.282,19.725 44.282,19.218 v1(44.3,19.2)
DTE_RD: DD2.4 R5.1 VD2.1 | length 30.4
  Top Layer w0.15: v1(18.875,27.075) 20.825,27.075 DD2.4@20.9,27.15
  Bottom Layer w0.15: v1(18.875,27.075) 21.1,29.3 32.5,29.3 41.4,20.4 v1(41.4,19.2)
DTE_TD: DD2.5 R6.1 VD3.1 | length 27.5
  Top Layer w0.15: v1(18.9,25.8) 19.1,25.8 19.95,26.65 DD2.5@20.9,26.65
  Bottom Layer w0.15: v1(18.9,25.8) 21.7,28.6 30.1,28.6 38.4,20.3 v1(38.4,19.2)
F\O\R\C\E\O\F\F\: DD1.13 DD2.14 | length 9.8
  Top Layer w0.15: DD1.13@22.225,21.375 22.225,22.725 23,23.5 25.4,23.5 26.2,24.3 26.2,26.3 25.85,26.65 DD2.14@24.5,26.65
GND: C1.2 C2.2 C3.1 C4.2 C5.1 C9.1 C10.1 C11.1 DD1.7 DD1.18 DD1.21 DD1.24 DD1.25 DD1.26 DD2.0 DD2.7 DD2.8 DD2.17 HL1.2 pad.2 S1.2 VD1.4 VD1.5 VD2.2 VD3.2 VD4.2 VD5.2 X1.5 X1.TP1 X2.6 X2.TP1 | length 8.7
  Top Layer w0.15: X1.5 8.389,15.459 9.025,16.095 VD1.4 ; VD1.5@14.5,15.97 VD1.5 ; DD2.0@21.95,26.65 DD2.0 ; C4.2@26.6,7.925 C4.2@27.05,8.375 ; DD2.7 21.45,26.25 21.7,26.5 21.95,26.25 DD2.8 DD2.7
  other v1: 18,2.5 22,2.5 26,2.5 30,2.5 34,2.5 38,2.5 42,2.5 46,2.5 49,2.5 2,4.5 11.2,6.7 14.6,6.7 2,7.5 4,7.5 6.5,7.5 19,9 11.2,9.8 14.6,9.8 19,10.5 27.6,10.9 29.3,10.9 31.1,10.9 19,12 8.5,13.5 10.5,13.5 15,13.5 17,13.5 19,13.5 9.5,14.5 35.2,14.7 38.4,14.7 41.4,14.7 44.3,14.7 17,15.4 33.8,26.4 21.9,26.9 23.5,26.9 32.7,27.5 4,28 7.5,28 22.7,28 2,29.5 2,31.5 8,31.5 2,34 4,34 6,34 8,34 12,34 16,34 20,34 24,34 28,34 32,34 36,34 40,34 44,34 48,34
I\N\V\A\L\I\D\: DD1.14 DD2.13 | length 8.9
  Top Layer w0.15: DD1.14@21.575,21.375 21.575,22.675 22.8,23.9 25.1,23.9 25.7,24.5 25.7,25.9 25.45,26.15 DD2.13@24.5,26.15
NetC1_1: C1.1 L1.1 VD1.8 | length 0
  Top Layer w0.15: VD1.8@14.6,19.93 VD1.8
NetC2_1: C2.1 DD1.19 R2.2 S1.1 | length 21.6
  Top Layer w0.15: S1.1@9.15,5.95 16.65,5.95 17.75,5.95 19.6,7.8 21.275,7.8 C2.1 23.1,7.775 23.1,9.5 24.175,10.575 DD1.19@24.175,14.225
NetC5_2: C5.2 DD1.17 | length 14.2
  Top Layer w0.15: DD1.17@22.975,14.225 22.975,12.125 v1(23.375,11.725) ; v1(29.3,4.65) C5.2
  Bottom Layer w0.15: v1(23.375,11.725) 23.882,11.725 29.3,6.307 v1(29.3,4.65)
NetC6_1: C6.1 DD2.2 | length 6.7
  Top Layer w0.15: C6.1 17.4,28.1 17.9,28.6 19.1,28.6 19.55,28.15 DD2.2@20.9,28.15
NetC6_2: C6.2 DD2.1 | length 6.6
  Top Layer w0.15: C6.2 14.85,29.2 19.3,29.2 19.85,28.65 DD2.1@20.9,28.65
NetC7_1: C7.1 DD2.23 | length 20.4
  Top Layer w0.15: C7.1 9.2,26.6 9.6,26.2 10.2,26.2 10.8,26.8 10.8,30.6 11.8,31.6 21.1,31.6 21.95,30.75 DD2.23@21.95,29.2
NetC7_2: C7.2 DD2.22 | length 17.7
  Top Layer w0.15: C7.2 9.2,30.8 10.6,32.2 21.6,32.2 22.4,31.4 22.4,30.697 DD2.22@22.4,29.25
NetC8_1: C8.1 DD2.16 | length 2.7
  Top Layer w0.15: DD2.16@24.525,27.625 24.5,27.65 25.05,27.65 25.4,27.3 C8.1
NetC8_2: C8.2 DD2.21 | length 12.7
  Top Layer w0.15: v1(22.9,30.4) 22.925,30.375 22.925,29.225 DD2.21@22.95,29.2 ; C8.2 29.257,27.3 29.9,27.943 v1(29.9,30.4)
  Bottom Layer w0.15: v1(22.9,30.4) 23.2,30.7 29.6,30.7 v1(29.9,30.4)
NetC9_2: C9.2 DD2.24 | length 11.6
  Top Layer w0.15: C9.2 12.5,29.55 12.5,30.6 12.9,31 20.5,31 21.45,30.05 DD2.24@21.45,29.2
NetC10_2: C10.2 DD2.20 | length 15.1
  Top Layer w0.15: DD2.20@23.425,29.225 23.45,29.2 23.45,30.95 24.5,32 33,32 34.35,30.65 C10.2
NetHL1_1: HL1.1 R1.1 | length 2.7
  Top Layer w0.15: HL1.1 34.875,7.8 35.225,8.15 35.225,8.175 35.575,8.525 R1.1@35.6,8.525
NetHL2_1: HL2.1 R3.1 | length 2.8
  Top Layer w0.15: HL2.1@42.4,6.1 42.4,7.75 43.175,8.525 R3.1@43.2,8.525
NetHL3_1: HL3.1 R4.1 | length 2.1
  Top Layer w0.15: HL3.1@38.6,6.1 38.6,7.925 R4.1@38.825,8.15
NetR5_2: R5.2 X2.2 | length 22.4
  Top Layer w0.15: v1(40,23.3) 40.075,23.3 41.375,22 R5.2@41.4,22 ; v1(47.8,14.9) 49,14.9 50,15.9 52.36,15.9 X2.2 X2.2@52.33,15.79
  Bottom Layer w0.15: v1(40,23.3) 42.9,20.4 42.9,19.2 43.6,18.5 48.3,18.5 49,17.8 49,15.9 v1@48,14.9
NetR6_2: R6.2 X2.3 | length 21.3
  Top Layer w0.15: v1(37.2,23.3) 37.286,23.214 37.286,23.089 38.375,22 R6.2@38.4,22 ; v1(47.8,17.3) 49.2,17.3 50.5,18.6 X2.3 X2.3@52.296,18.704
  Bottom Layer w0.15: v1(37.2,23.3) 39.6,20.9 39.6,19.3 41.6,17.3 v1@48,17.3
NetR7_2: R7.2 X2.7 | length 28.4
  Top Layer w0.15: v1(34.1,23.3) 34.186,23.214 34.186,23.064 35.275,21.975 R7.2@35.3,21.975 ; v1(47.8,16.1) 49.2,16.1 50.3,17.2 55.77,17.2 X2.7
  Bottom Layer w0.15: v1(34.1,23.3) 36.7,20.7 36.7,18.7 39.3,16.1 v1@48,16.1
NetR8_2: R8.2 X2.8 | length 12.5
  Top Layer w0.15: R8.2@44.3,21.975 46.725,21.975 48.7,20 55.97,20 X2.8@56,19.97
RTS: DD1.3 DD2.9 | length 13.9
  Top Layer w0.15: v1(20.8,24.1) 21.3,24.6 22,24.6 22.412,25.012 22.412,25.562 DD2.9@22.45,25.6 ; v1(28.7,22.8) 28.713,22.788 28.713,21.387 DD1.3@28.725,21.375
  Bottom Layer w0.15: v1(20.8,24.1) 20.8,23.611 23.049,21.362 27.262,21.362 v1(28.7,22.8)
RTS_OUT: DD2.6 R7.1 VD5.1 | length 24.1
  Top Layer w0.15: v1(18.9,24.3) 18.9,24.9 20.15,26.15 DD2.6@20.9,26.15
  Bottom Layer w0.15: v1(18.9,24.3) 20.8,26.2 29.8,26.2 35.3,20.7 v1(35.3,19.2)
RXD: DD1.5 DD2.11 | length 10.2
  Top Layer w0.15: DD2.11@23.45,25.6 23.475,25.575 23.475,24.625 v1(23.5,24.6) ; v1(27.4,22.8) 27.413,22.788 27.413,21.387 DD1.5@27.425,21.375
  Bottom Layer w0.15: v1(23.5,24.6) 23.5,24.089 22.7,23.289 22.7,22.5 23.3,21.9 26.5,21.9 v1(27.4,22.8)
RXLED: DD1.22 HL3.2 | length 20.3
  Top Layer w0.15: v1(26.1,12.4) 26.113,12.412 26.113,14.288 DD1.22 ; HL3.2@40.25,6.1 40.25,7.05 v1(40.8,7.6)
  Bottom Layer w0.15: v1(26.1,12.4) 27.293,12.4 28.193,11.5 31.7,11.5 34.2,9 39.4,9 v1(40.8,7.6)
TXD: DD1.1 DD2.10 | length 14.1
  Top Layer w0.15: v1(22,24.1) 22.912,25.012 22.912,25.562 DD2.10@22.95,25.6 ; v1(30,22.8) 30.013,22.788 30.013,21.387 DD1.1@30.025,21.375
  Bottom Layer w0.15: v1(22,24.1) 22.1,24.1 23.6,25.6 28.9,25.6 30,24.5 v1(30,22.8)
TXLED: DD1.23 HL2.2 | length 23.6
  Top Layer w0.15: DD1.23@26.775,14.225 26.775,13.125 27,12.9 27.9,12.9 v1(28.4,12.4) ; DD1.23@26.875,13.6 DD1.23@26.875,14.225 ; HL2.2@44.05,6.1 44.05,7.05 v1(44.6,7.6)
  Bottom Layer w0.15: v1(28.4,12.4) 31.55,12.4 34.15,9.8 42.4,9.8 v1(44.6,7.6)
USB_D_N: DD1.16 VD1.7 | length 14.5
  Top Layer w0.155: VD1.7 14.909,18.635 15.107,18.438 15.107,18.243 15.198,18.153 16.687,18.153 v1@16.897,18.363 ; DD1.16@22.325,14.225 22.325,13.609 22.153,13.437 22.153,12.038 22.362,11.828 v1(22.362,11.725)
  Bottom Layer w0.155: v1(17,18.363) 17.103,18.363 17.313,18.153 17.659,18.153 22.153,13.659 22.153,12.038 22.362,11.828 v1(22.362,11.725)
USB_D_P: DD1.15 VD1.6 | length 13.9
  Top Layer w0.155: VD1.6 14.909,17.365 15.107,17.562 15.107,17.757 15.198,17.847 16.687,17.847 v1@16.897,17.638 ; v1(21.637,11.725) 21.637,11.828 21.847,12.038 21.847,13.437 21.675,13.609 DD1.15@21.675,14.225
  Bottom Layer w0.155: v1(17,17.638) 17.103,17.638 17.313,17.847 17.533,17.847 21.847,13.533 21.847,12.038 21.637,11.828 v1(21.637,11.725)
pads on no net: DD1.2 DD1.6 DD1.8 DD1.9 DD1.10 DD1.12 DD1.27 DD1.28 DD2.15 X1.4 X2. X2.1 X2.4 X2.5 X2.9

## Polygon pours and split planes (outlines as drawn)
GND on Top Layer "Top Layer-GND" (solid, pour order 48): 0,36.5 60.5,36.5 60.5,0 0,0
NetC1_1 on Top Layer "Top Layer-NetC1_1" (solid, pour order 42): 11.6,24.4 11.6,22.5 13.2,22.5 13.2,20.5 13.6,20.5 13.6,19.3 16,19.3 16,23.3 13.1,23.3 13.1,24.4
+5V on Top Layer "Top Layer-+5V 3" (solid, pour order 36): 11.3,22.5 8.22,22.5 8.22,24.4 11.3,24.4
+5V on Top Layer "Top Layer-+5V 1" (solid, pour order 12): 22.4,6.9 22.4,4.1 28,4.1 28,6.5 24.5,6.5 24.5,6.9
CTS_IN on Top Layer "Top Layer-CTS_IN" (solid, pour order 22): 43.2,21.2 45.4,21.2 45.4,17.5 43.2,17.5
DTE_RD on Top Layer "Top Layer-DTE_RD" (solid, pour order 20): 40.3,21.2 42.5,21.2 42.5,17.5 40.3,17.5
DTE_TD on Top Layer "Top Layer-DTE_TD" (solid, pour order 18): 37.3,21.2 39.5,21.2 39.5,17.5 37.3,17.5
RTS_OUT on Top Layer "Top Layer-RTS_OUT" (solid, pour order 16): 34.2,21.2 36.4,21.2 36.4,17.4 34.2,17.4
+5V on Top Layer "Top Layer-+5V 2" (solid, pour order 6): 44.1,9.3 34.8,9.3 34.8,11.9 44.1,11.9
+5V on Top Layer "Top Layer-+5V" (solid, pour order 34): 27.675,28.5 24.2,28.5 24.2,28.9 23.8,28.9 23.8,30.7 27.675,30.7
no net on Top Layer "Top Layer-No Net" (solid, pour order 46): -40,86.5
GND on Signal Layer 1 "Signal Layer 1-GND" (solid, pour order 0): 0,41.5 63.6,41.5 63.6,0 0,0
GND on Bottom Layer "Bottom Layer-GND" (solid, pour order 50): 0,36.5 60.5,36.5 60.5,0 0,0
+5V on Signal Layer 2 "Signal Layer 2-+5V" (solid, pour order 2): 0,41.5 63.6,41.5 63.6,0 0,0

## Silkscreen, mask and mechanical layers (free items; w line width, h text height)
Top Overlay:
  text ".designation" at 0.4,0.6 h2
Bottom Overlay:
  text ".pcb_dec_number" at 16.7,0.6 h2
Board:
  the board outline again, w0.1
Assembly Notes (Mech5):
  text "'.title'" at 0,-2.5 h2
  text "'.project'_'.pcb_dec_number'['.Pcb_File_Name_No_Path']" at 0,-5 h2